# Altium PCB fireAlarm.PcbDoc
Units mil, origin at the board's own origin, x right, y up, seen from the top; angles counter-clockwise.
Board outline 7614.17 x 3429.13 mil, 2 copper layers (Top Layer, Top, Bottom Layer, Bottom); 17 components, 14 nets, 41 pads, 0 vias.
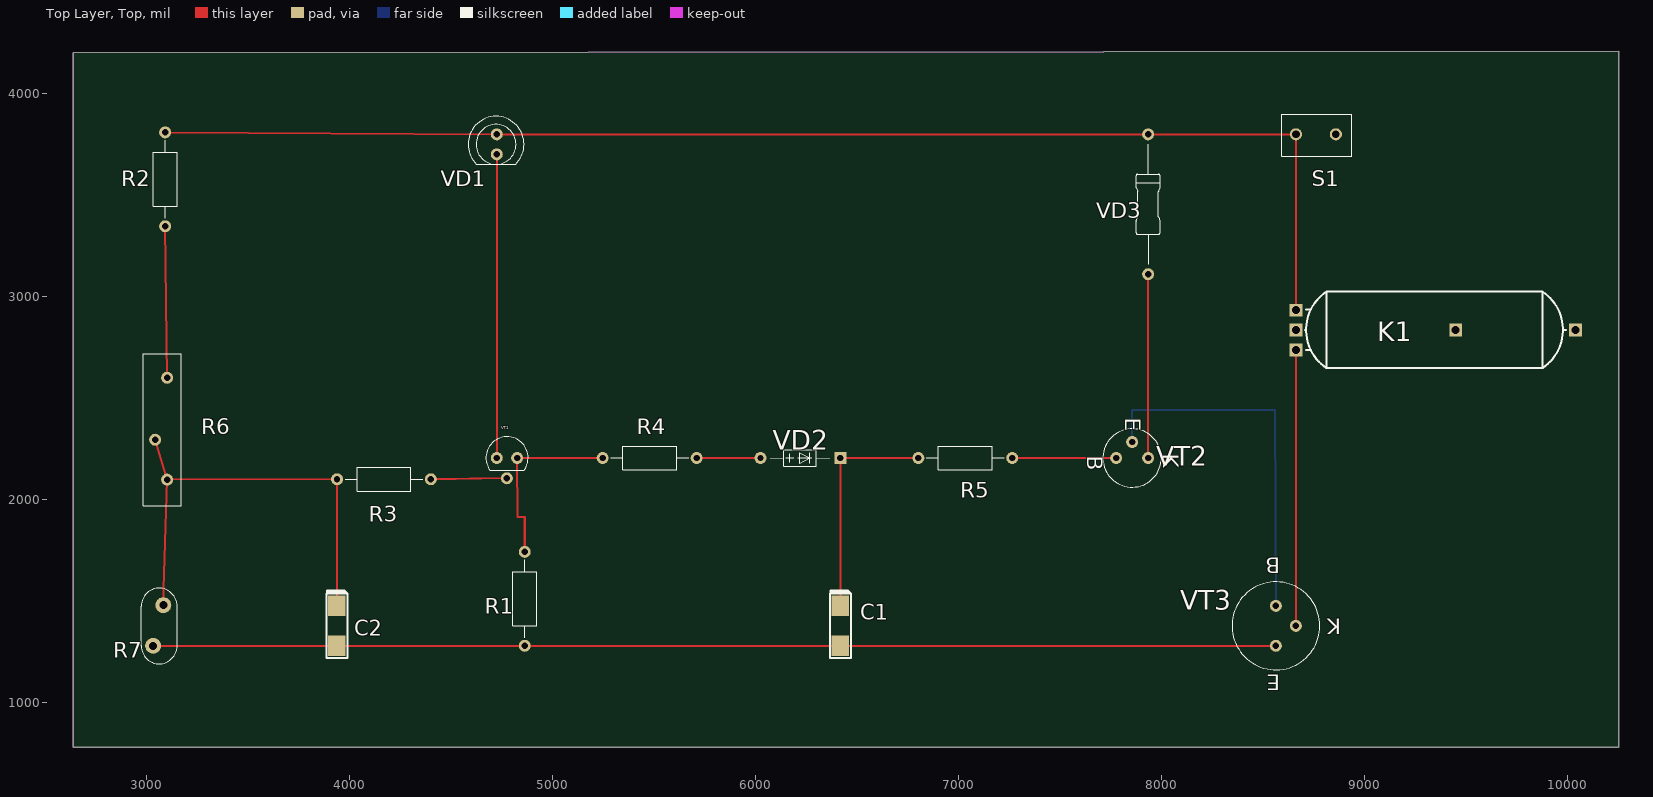
[diagram p0: Top Layer, Top view]
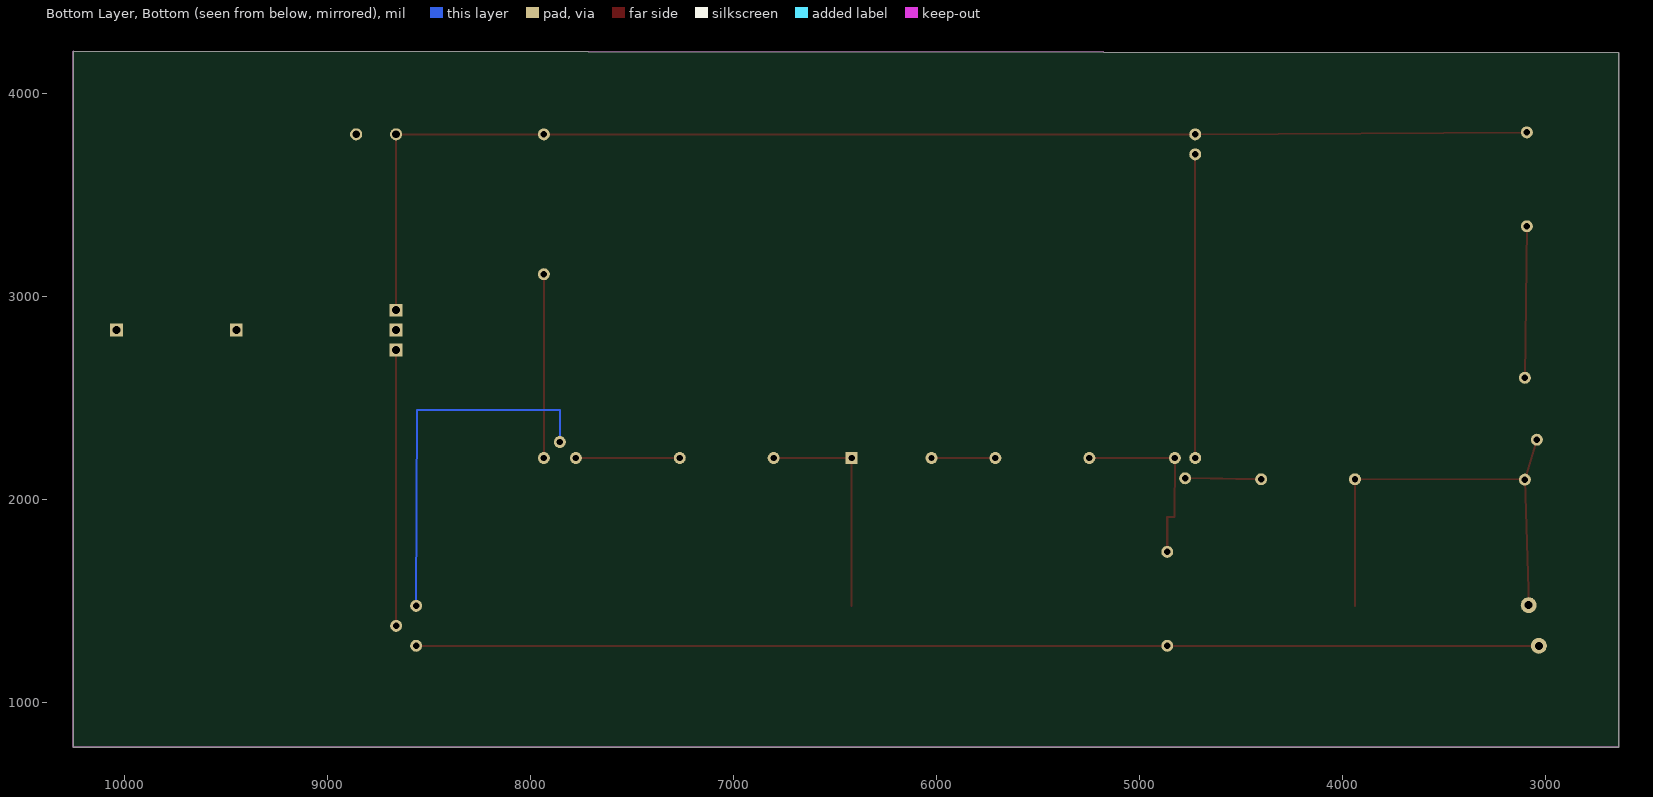
[diagram p1: Bottom Layer, Bottom view, seen from below]

## Layer stack, top to bottom
Top Solder, Top Mask: solder mask 0.4, Solder Resist, Dk 3.5
Top Layer, Top: signal copper 1.4
Dielectric 1: dielectric 12.6, FR-4, Dk 4.8
Bottom Layer, Bottom: signal copper 1.4
Bottom Solder, Bot Mask: solder mask 0.4, Solder Resist, Dk 3.5

## Board outline
2637.8,4200.79 2637.8,795.28 2637.8,779.53 10251.97,779.53 10251.97,4208.66

## Design rules (kind name [scope] priority, off if disabled: settings)
Clearance [All] p1: gap=10 ignorepadtopadclearanceinfootprint=FALSE except(0: Arc-Hole Track-Hole SMDPad-Hole THPad-Hole Via-Hole Fill-Hole Poly-Hole Region-Hole Text-Hole; 11.81: Arc-Arc Arc-Track Arc-THPad Arc-Via Track-Track Track-THPad Track-Via THPad-THPad THPad-Via Via-Via)
PlaneClearance [All] p1: clearance=10
PolygonConnect [All] p1: connectstyle=Relief reliefconductorwidth=10 reliefentries=4 polygonreliefangle="90 Angle" airgapwidth=10
RoutingVias [All] p1: holewidth=28 width=50 viastyle="Through Hole" minholewidth=28 minwidth=50 maxholewidth=28 maxwidth=50
SolderMaskExpansion [All] p1: expansion=4 istentingtop=FALSE
Width [All] p1: maxlimit=10 minlimit=10 preferedwidth=10
29 further rules are at their usual default settings.

## Components (designator, comment, footprint, x,y, rotation, side; value= is the part's Value field where it differs from the comment)
C1 "50mk" CE6032_C 6417.32,1377.95 r270 top
C2 "0,01mk" CE6032_C 3937.01,1377.95 r270 top
K1 "" RES64 8661.42,2736.22 r0 top
R1 "470" C2-33H-0.25W 4862.2,1279.53 r90 top
R2 "1k" C2-33H-0.25W 3090.55,3346.46 r90 top
R3 "1k" C2-33H-0.25W 4400,2100 r180 top
R4 "1k" C2-33H-0.25W 5708.66,2204.72 r180 top
R5 "0,75" C2-33H-0.25W 7263.78,2204.72 r180 top
R6 "47k" 3006P 3100,2600 r270 top
R7 "100k" PTC-3 3031.5,1279.53 r90 top
S1 "" 8AS9M2RE 8858.27,3799.21 r180 top
VD1 "" LED-5MM 4724.41,3799.21 r180 top
VD2 "" КД521(522)_КД522А(Primary) 6417.32,2204.72 r0 top
VD3 "" КД503А_КД503А(Primary) 7933.07,3110.24 r90 top
VT1 "" TO-92-4_КТ3107Е(Primary) 4724.41,2204.72 r0 top
VT2 "" КТ312_КТ312(Primary) 7933.07,2204.72 r270 top
VT3 "" КТ605_КТ608Б(Primary) 8562.99,1279.53 r180 top

## Footprints (in the part's own frame and the unit in brackets; to place one, negate y for a bottom-side part, rotate by r counter-clockwise, add the part's x,y. Pads: shape width x height; smd on the part's side, far side on the other; paste and mask are expansions set on the pad)
8AS9M2RE [mil]
  round 60 hole 38: 1(0,0) 2(196.85,0)
  silkscreen extent -79,-98 266,108
3006P [mm]
  round 1.5 hole 0.8: 1(0,0) 2(7.75,-1.5) 3(12.75,0)
  silkscreen extent -3,-3 16,1.75
C2-33H-0.25W [mm]
  round 1.5 hole 0.8: 1(0,0) 2(11.75,0)
  silkscreen extent 1,-1.5 10.75,1.5
CE6032_C [mm]
  rect 2.6x2.2 smd: 1(-2.5,0) 2(2.5,0)
  silkscreen extent -4.44,-1.3 4.05,1.3
LED-5MM [mm]
  round 1.5 hole 0.8: 1(0,0) 2(0,2.5)
  silkscreen extent -3.41,-2.25 3.59,3.75
PTC-3 [mm]
  round 2 hole 1: 1(0,0) 2(5.08,-1.27)
  silkscreen extent -2.25,-3 7.21,1.5
RES64 [mm]
  rect 1.6x1.6 hole 1: 1(0,0) 2(0,5) 3(0,2.5) 4(35,2.5) 5(20,2.5)
  silkscreen extent 1.14,-2.24 33.78,7.32
TO-92-4_КТ3107Е(Primary) [mm]
  round 1.5 hole 0.8: B(1.27,-2.54) C(0,0) E(2.54,0)
  silkscreen extent -1.35,-1.5 3.92,2.65
КД503А_КД503А(Primary) [mm]
  round 1.5 hole 0.8: A(0,0) K(17.5,0)
  silkscreen extent 1.25,-1.51 16.25,1.5
КД521(522)_КД522А(Primary) [mm]
  round 1.5 hole 0.8: 1(-10,0)
  rect 1.5x1.5 hole 0.8: 2(0,0)
  silkscreen extent -8.71,-1.02 -1.4,1.02
КТ312_КТ312(Primary) [mm]
  round 1.5 hole 0.8: B(0,-4) E(-2,-2) K(0,0)
  silkscreen extent -3.65,-5.65 3.65,1.65
КТ605_КТ608Б(Primary) [mm]
  round 1.5 hole 0.8: 1(0,-5) 2(0,0) 3(-2.5,-2.5)
  silkscreen extent -5.5,-8 5.5,3

## Nets (pads, with @x,y where several pads share a name; then routed paths per layer and width w, separated by ;. In a path a pad name is that pad's centre, name@x,y a point inside that pad or via, vN(x,y) a via of type N, cw(c..) or ccw(c..) an arc to the next point about the centre after c; other vN are vias at no path point)
+12B: S1.1
NET00000: K1.2 R2.2 S1.2 VD1.1 VD3.K | length 6437
  Top Layer, Top w10: R2.2 VD1.1 VD3.K S1.2 K1.2
NET00001: K1.1 VT3.3 | length 1358.3
  Top Layer, Top w10: VT3.3 K1.1
NET00002: C1.2 C2.2 R1.1 R7.1 VT3.2 | length 5531.5
  Top Layer, Top w10: R7.1 C2.2 R1.1 C1.2 VT3.2
NET00003: C2.1 R3.2 R6.2 R6.3 R7.2 | length 2286.1
  Top Layer, Top w10: R6.2 3100.39,2098.43 R6.3 ; R7.2 3080.71,1480.32 R6.3 ; C2.1 R3.2 3937.01,2100.39 R6.3
NET00004: R2.1 R6.1 | length 746.5
  Top Layer, Top w10: R2.1 R6.1
NET00005: VD1.2 VT1.C | length 1496.1
  Top Layer, Top w10: VT1.C VD1.2
NET00006: R1.2 R4.2 VT1.E | length 921.7
  Top Layer, Top w10: R1.2 4862.2,1913.39 4826.77,1913.39 VT1.E R4.2 R4.2@5248.03,2204.72
NET00007: VD3.A VT2.K | length 905.5
  Top Layer, Top w10: VT2.K VD3.A
NET00008: VT2.E VT3.1 | length 1826.8
  Bottom Layer, Bottom w10: VT2.E 7854.33,2440.94 8559.06,2440.94 VT3.1
NET00009: R3.1 VT1.B | length 377.6
  Top Layer, Top w10: R3.1 4775.59,2106.3 VT1.B
NET00010: R4.1 VD2.1 | length 315
  Top Layer, Top w10: R4.1 VD2.1
NET00011: C1.1 R5.2 VD2.2 | length 1112.2
  Top Layer, Top w10: C1.1 VD2.2 R5.2
NET00012: R5.1 VT2.B | length 511.8
  Top Layer, Top w10: R5.1 VT2.B
pads on no net: K1.3 K1.4 K1.5

## Keep-outs
Keep-Out Layer, Board:
  the board outline again, w5

## Text inside footprints (layer, text, board x,y; h text height)
VD1: Mechanical 1, Top Assy "A" at 4685.04,3814.96 h24.61 r180
VD3: Mechanical 1, Top Assy "A" at 7883.86,3110.24 h78.12 r90; Mechanical 1, Top Assy "K" at 7883.86,3750 h78.12 r90
VT1: Mechanical 1, Top Assy "E" at 4814.57,2235.83 h12.3; Mechanical 1, Top Assy "C" at 4696.46,2235.83 h12.3; Mechanical 1, Top Assy "BASE" at 4753.94,2155.51 h12.3
VT2: Top Overlay, Top Silk "K" at 8007.38,2226.69 h78.12 r270; Top Overlay, Top Silk "B" at 7633.37,2216.84 h78.12 r270; Top Overlay, Top Silk "E" at 7820.37,2402.25 h78.12 r270
VT3: Mechanical 1, Top Assy "E" at 8583.35,1136.32 h78.12 r180; Mechanical 1, Top Assy "B" at 8584.95,1713.48 h78.12 r180; Mechanical 1, Top Assy "K" at 8884.95,1413.48 h78.12 r180; Top Overlay, Top Silk "E" at 8583.35,1136.32 h78.12 r180; Top Overlay, Top Silk "B" at 8584.95,1713.48 h78.12 r180; Top Overlay, Top Silk "K" at 8884.95,1413.48 h78.12 r180